# Altium PCB PCBFireflyCaseTest.PcbDoc
Units mil, origin at the board's own origin, x right, y up, seen from the top; angles counter-clockwise.
Board outline 2748 x 1826 mil, 3 copper layers (Top Layer, Mid-Layer 2, Bottom Layer); 119 components, 130 nets, 459 pads, 50 vias.
Unrouted connection lines stored in the file: 286.
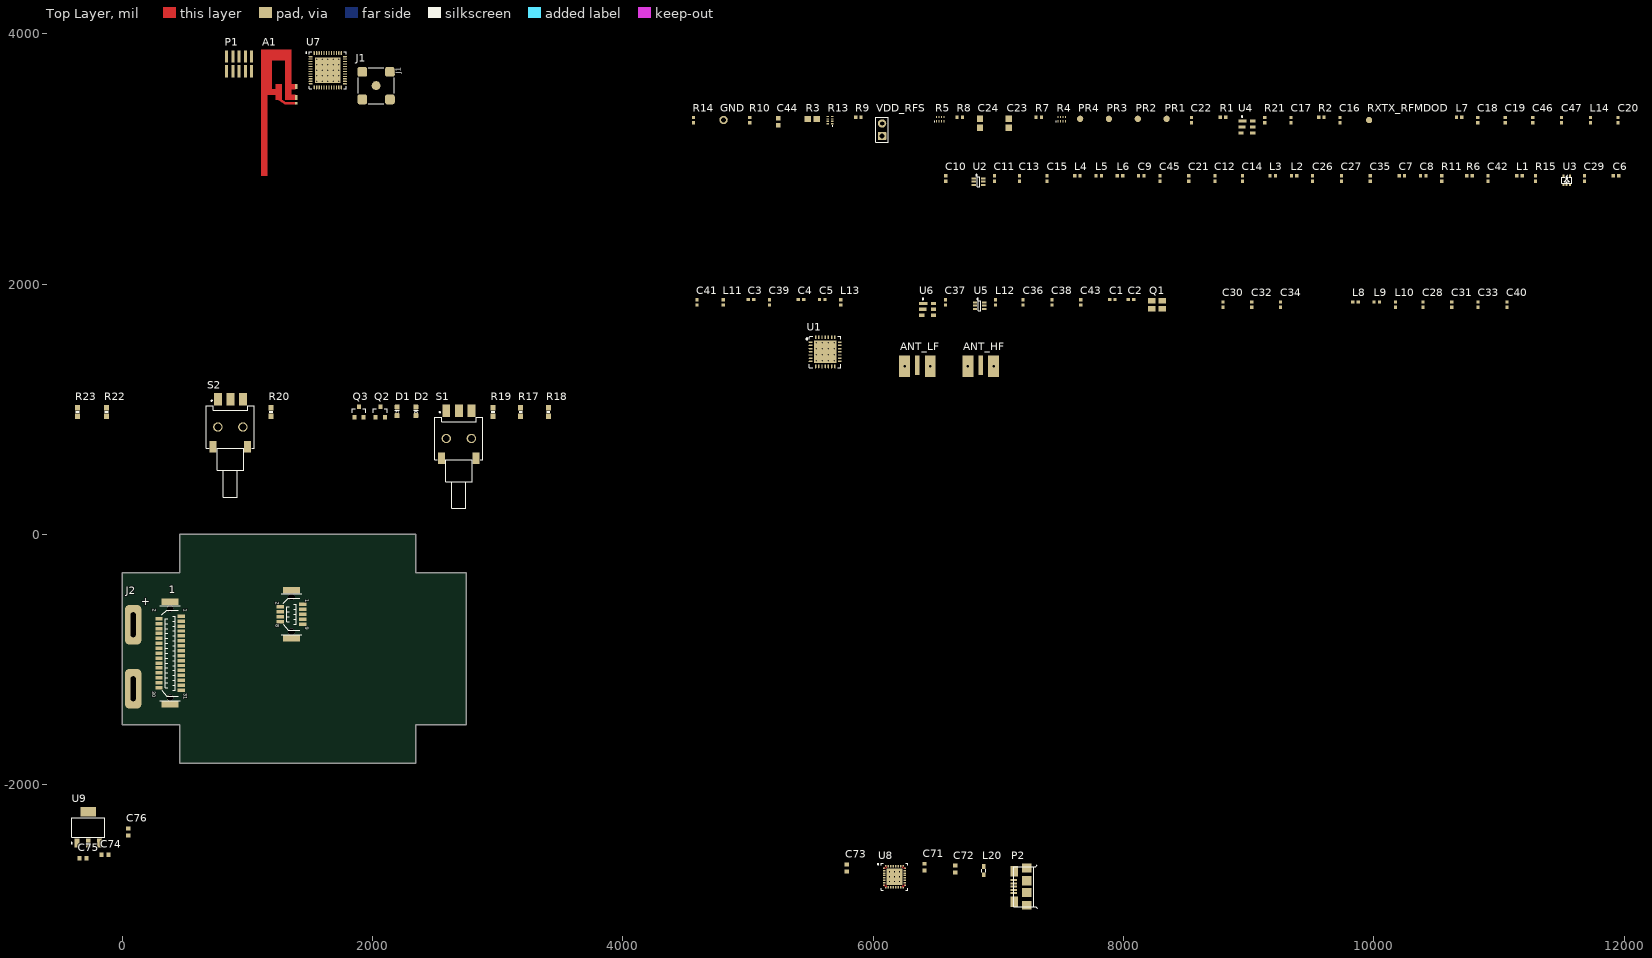
[diagram p0: Top Layer view]
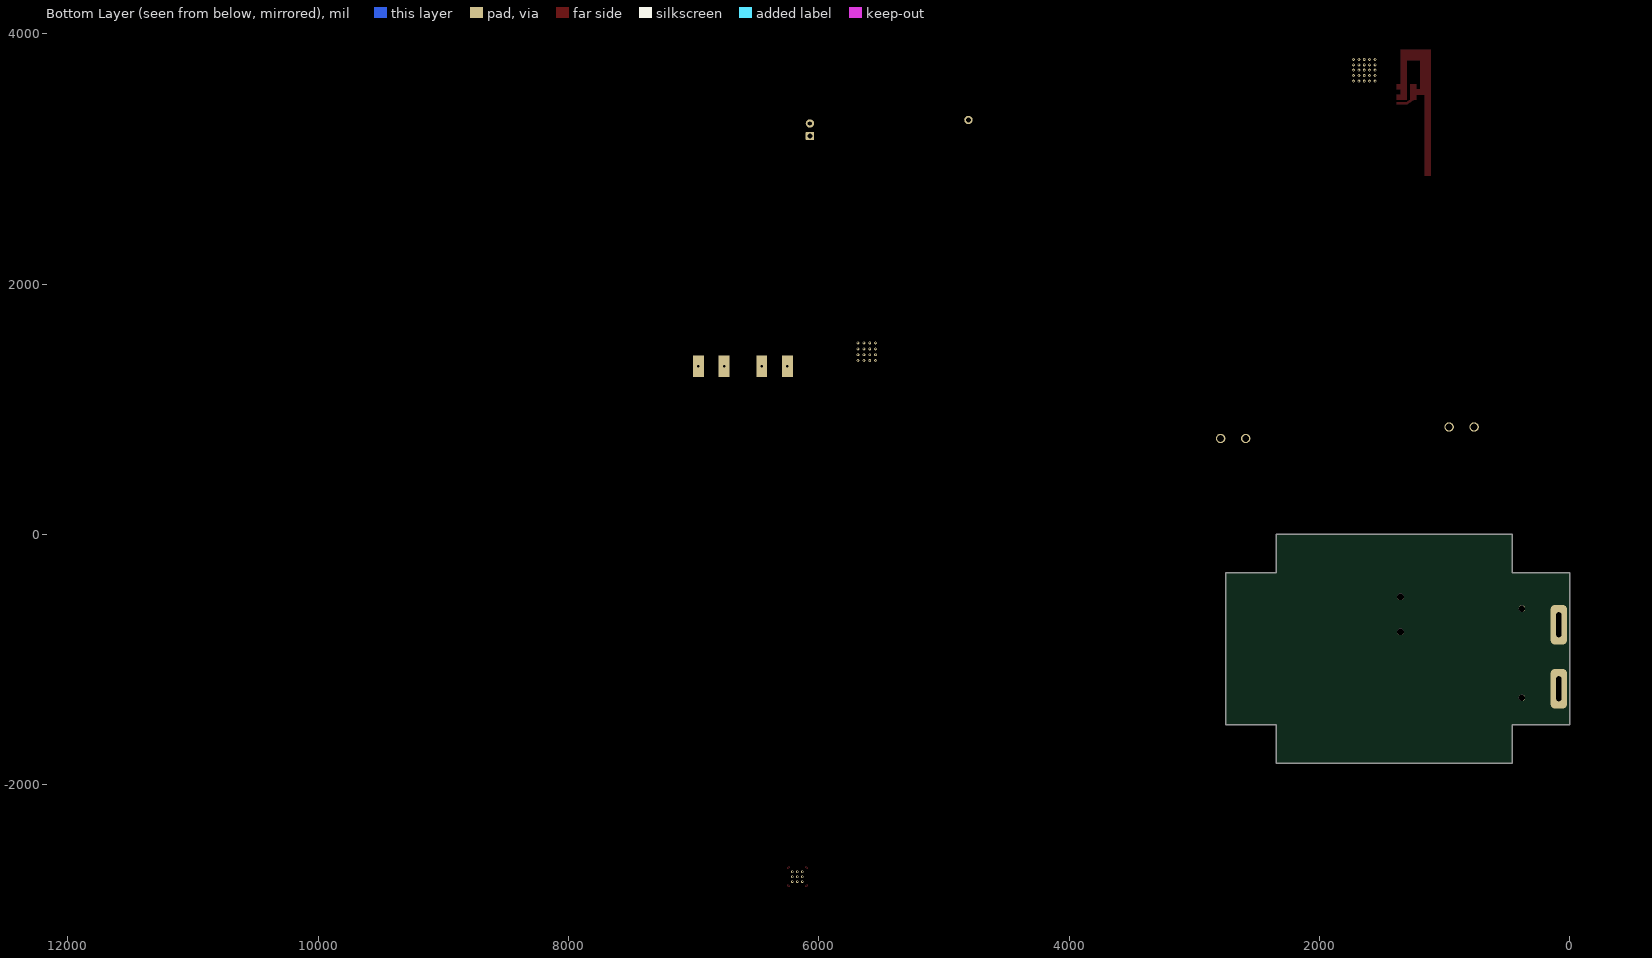
[diagram p1: Bottom Layer view, seen from below]

## Layer stack, top to bottom
Top Solder: solder mask 0.4, Solder Resist, Dk 3.5
Top Layer: signal copper 1.4
Dielectric 1: dielectric 12.6, FR-4, Dk 4.8
Mid-Layer 2: signal copper 1.4
Dielectric2: dielectric 12.6, FR-4, Dk 4.8
Bottom Layer: signal copper 1.4
Bottom Solder: solder mask 0.4, Solder Resist, Dk 3.5

## Board outline
0,-305 462,-305 462,0 2345,0 2345,-305 2748,-305 2748,-1521 2345,-1521 2345,-1826 462,-1826 462,-1521 0,-1521 0,-305

## Design rules (kind name [scope] priority, off if disabled: settings)
Clearance [All] p1: gap=10
PolygonConnect [All] p1: connectstyle=Relief reliefconductorwidth=10 reliefentries=4 polygonreliefangle="90 Angle" airgapwidth=10
RoomDefinition "TI CC 2650 MCU + Radio" [InComponentClass('TI CC 2650 MCU + Radio')] p1: confinementstyle=ConfineIn formatcopy=TRUE lockcomponents=FALSE outline 805.24,2859.24 2247.24,2859.24 2247.24,3977.24 805.24,3977.24
RoomDefinition "Semtech SX1276 Radio" [InComponentClass('Semtech SX1276 Radio')] p2: confinementstyle=ConfineIn formatcopy=TRUE lockcomponents=FALSE outline 4281.86,1258.22 12275,1258.22 12275,3451.65 4281.86,3451.65
RoomDefinition FTDIModule [InComponentClass('FTDIModule')] p3: confinementstyle=ConfineIn formatcopy=TRUE lockcomponents=FALSE outline 5883.1,-3007.39 7320.1,-3007.39 7320.1,-2518.39 5883.1,-2518.39
RoomDefinition Peripherals [InComponentClass('Peripherals')] p4: confinementstyle=ConfineIn formatcopy=TRUE lockcomponents=FALSE outline -882,122.54 3931.87,122.54 3931.87,1651.54 -882,1651.54
RoutingVias [All] p1: holewidth=28 width=50 viastyle="Through Hole" minholewidth=28 minwidth=50 maxholewidth=28 maxwidth=50
SolderMaskExpansion [All] p1: expansion=4
Width [All] p1: maxlimit=10 minlimit=10 preferedwidth=10
30 further rules are at their usual default settings.

## Classes and differential pairs
component class Peripherals: 1 D1 D2 Q2 Q3 R17 R18 R19 R20 R22 R23 S1 S2
component class FTDIModule: C71 C72 C73 L20 P2 U8
component class Main: C74 C75 C76 J2 U9
component class "Semtech SX1276 Radio": ANT_HF ANT_LF C1 C2 C3 C4 C5 C6 C7 C8 C9 C10 C11 C12 C13 C14 C15 C16 C17 C18 C19 C20 C21 C22 C23 C24 C26 C27 C28 C29 C30 C31 C32 C33 C34 C35 C36 C37 C38 C39 C40 C41 C42 C43 C44 C45 C46 C47 GND L1 L2 L3 L4 L5 L6 L7 L8 L9 L10 L11 L12 L13 L14 PR1 PR2 PR3 PR4 Q1 R1 R2 R3 R4 R5 R6 R7 R8 R9 R10 R11 R13 R14 R15 R21 RXTX_RFMDOD U1 U2 U3 U4 U5 U6 VDD_RFS
component class "TI CC 2650 MCU + Radio": A1 C25 C48 C49 C50 C51 C52 C53 C54 C55 C56 C57 C58 C59 C60 C61 C62 C63 C64 C65 C66 C67 C68 C69 C70 FL1 J1 L15 L16 L17 L18 L19 P1 R12 U7 Y1 Y2
net class ADIO[0..7]: ADIO0 ADIO4 ADIO5 ADIO7 ADIO27 ADIO28 ADIO29 ADIO30
net class CBUS[0..4]: CBUS0 CBUS1 CBUS2 CBUS3 CBUS4
net class DIO[0..30]: DIO0 DIO1 DIO2 DIO3 DIO4 DIO5 DIO6 DIO7 DIO8 DIO9 DIO10 DIO11 DIO12 DIO13 DIO14 DIO15 DIO16 DIO17 DIO18 DIO19 DIO20 DIO21 DIO22 DIO23 DIO24 DIO25 DIO26

## Components (designator, comment, footprint, x,y, rotation, side; value= is the part's Value field where it differs from the comment)
1 "Addon Board for Firefly Sensor Nodes    This version is compliant with Firefly Micro powered by Atmel Atmega128RFA1.    Connectors on female gender match those on Firefly Micro Board.    Connectors on male gender mate with Firefly Micro Board. Use these for addons." FIREFLY_MICRO_BOARD 1014,-909 r0 top
A1 "2.4GHz" ANTENNA_DN007AN 1256.24,3368.24 r90 top
ANT_HF "SMA" "SMA END LAUNCH JACK RECEPTACLE SHORT" 6859,1351 r180 top
ANT_LF "SMA" "SMA END LAUNCH JACK RECEPTACLE SHORT" 6353,1351 r180 top
C1 "Cap" rlc_402_smd 7910.65,1875.65 r0 top
C2 "Cap" rlc_402_smd 8059.65,1875.65 r0 top
C3 "Cap" rlc_402_smd 5023.65,1875.65 r0 top
C4 "Cap" rlc_402_smd 5423.65,1875.65 r0 top
C5 "Cap" rlc_402_smd 5593.65,1875.65 r0 top
C6 "Cap" rlc_402_smd 11933,2865.65 r0 top
C7 "Cap" rlc_402_smd 10223,2865.65 r0 top
C8 "Cap" rlc_402_smd 10393,2865.65 r0 top
C9 "Cap" rlc_402_smd 8141,2865.65 r0 top
C10 "Cap" rlc_402_smd 6579,2843.65 r90 top
C11 "Cap" rlc_402_smd 6969,2843.65 r90 top
C12 "Cap" rlc_402_smd 8730,2843.65 r90 top
C13 "Cap" rlc_402_smd 7169,2843.65 r90 top
C14 "Cap" rlc_402_smd 8950,2843.65 r90 top
C15 "Cap" rlc_402_smd 7389,2843.65 r90 top
C16 "Cap" rlc_402_smd 9728,3309.65 r90 top
C17 "Cap" rlc_402_smd 9338,3309.65 r90 top
C18 "Cap" rlc_402_smd 10829,3309.65 r90 top
C19 "Cap" rlc_402_smd 11049,3309.65 r90 top
C20 "Cap" rlc_402_smd 11950,3309.65 r90 top
C21 "Cap" rlc_402_smd 8520,2843.65 r90 top
C22 "Cap" rlc_402_smd 8542,3309.65 r90 top
C23 "Cap" rlc_805_smd 7083,3283.65 r90 top
C24 "Cap" rlc_805_smd 6853,3283.65 r90 top
C26 "Cap" rlc_402_smd 9510,2843.65 r90 top
C27 "Cap" rlc_402_smd 9741,2843.65 r90 top
C28 "Cap" rlc_402_smd 10392,1835.65 r90 top
C29 "Cap" rlc_402_smd 11681,2843.65 r90 top
C30 "Cap" rlc_402_smd 8794,1835.65 r90 top
C31 "Cap" rlc_402_smd 10622,1835.65 r90 top
C32 "Cap" rlc_402_smd 9024,1835.65 r90 top
C33 "Cap" rlc_402_smd 10832,1835.65 r90 top
C34 "Cap" rlc_402_smd 9254,1835.65 r90 top
C35 "Cap" rlc_402_smd 9971,2843.65 r90 top
C36 "Cap" rlc_402_smd 7197.65,1853.65 r90 top
C37 "Cap" rlc_402_smd 6577.65,1853.65 r90 top
C38 "Cap" rlc_402_smd 7427.65,1853.65 r90 top
C39 "Cap" rlc_402_smd 5171.65,1853.65 r90 top
C40 "Cap" rlc_402_smd 11062,1835.65 r90 top
C41 "Cap" rlc_402_smd 4591.65,1853.65 r90 top
C42 "Cap" rlc_402_smd 10911,2843.65 r90 top
C43 "Cap" rlc_402_smd 7658.65,1853.65 r90 top
C44 "Cap Semi" rlc_603_smd 5240,3296.65 r90 top
C45 "Cap" rlc_402_smd 8290,2843.65 r90 top
C46 "Cap" rlc_402_smd 11269,3309.65 r90 top
C47 "Cap" rlc_402_smd 11499,3309.65 r90 top
C71 "Cap 0603" 1608[0603] 6410,-2658 r90 top
C72 "Cap 0603" 1608[0603] 6654.1,-2673.39 r90 top
C73 "Cap 0603" 1608[0603] 5789,-2663 r90 top
C74 "Cap Semi" 1608[0603] -137,-2558 r180 top
C75 "Cap Semi" 1608[0603] -313,-2586 r0 top
C76 "Cap Semi" 1608[0603] 48,-2376 r90 top
D1 "Green" LED-0603 2197,983.54 r0 top
D2 "Red" LED-0603 2347,983.54 r0 top
GND "Test Pin" pin_1mm 4805,3310.65 r90 top
J1 "DNM" HUSTSAN_SMA10V21TGGAN 2029.24,3585.24 r90 top
J2 "Battery Terminal" "Battery Terminal" 89,-977 r0 top
L1 "Inductor" rlc_402_smd 11163,2865.65 r0 top
L2 "Inductor" rlc_402_smd 9362,2865.65 r0 top
L3 "Inductor" rlc_402_smd 9192,2865.65 r0 top
L4 "Inductor" rlc_402_smd 7631,2865.65 r0 top
L5 "Inductor" rlc_402_smd 7801,2865.65 r0 top
L6 "Inductor" rlc_402_smd 7971,2865.65 r0 top
L7 "Inductor" rlc_402_smd 10680,3331.65 r0 top
L8 "Inductor" rlc_402_smd 9853,1857.65 r0 top
L9 "Inductor" rlc_402_smd 10023,1857.65 r0 top
L10 "Inductor" rlc_402_smd 10172,1835.65 r90 top
L11 "Inductor" rlc_402_smd 4801.65,1853.65 r90 top
L12 "Inductor" rlc_402_smd 6977.65,1853.65 r90 top
L13 "Inductor" rlc_402_smd 5741.65,1853.65 r90 top
L14 "Inductor" rlc_402_smd 11730,3309.65 r90 top
L20 "62 Ω" WE-CBA_0603_HC 6884.1,-2685.39 r90 top
P1 "Cortex Debug Header" "Header 1.27mm 2x5 SMD" 935.24,3759.24 r0 top
P2 "USB?" MicroUSB_TypeB 7227.1,-2962.39 r90 top
PR1 "Test Pin" pin_SMD 8344,3319.65 r90 top
PR2 "Test Pin" pin_SMD 8114,3319.65 r90 top
PR3 "Test Pin" pin_SMD 7883,3319.65 r90 top
PR4 "Test Pin" pin_SMD 7653,3319.65 r90 top
Q1 "Xtal" "nd3225da - nd2520da" 8266.65,1834.65 r0 top
Q2 "Common NMOSFET Parts      MFG P/NStore IDProd ID   FDD8780		TRANS-09984	   SI7820DN		TRANS-11055	   FDS6630A		IC-08089	   2N7002PW		TRANS-11151	   FQP30N06L	  COM-10213	TRANS-10060	   BSS123LT1G		TRANS-08345	   BSS138		TRANS-00830	   BS170			   2N7000" SOT23-3 2063,976.54 r0 top
Q3 "Common NMOSFET Parts      MFG P/NStore IDProd ID   FDD8780		TRANS-09984	   SI7820DN		TRANS-11055	   FDS6630A		IC-08089	   2N7002PW		TRANS-11151	   FQP30N06L	  COM-10213	TRANS-10060	   BSS123LT1G		TRANS-08345	   BSS138		TRANS-00830	   BS170			   2N7000" SOT23-3 1893,976.54 r0 top
R1 "Resistor" rlc_402_smd 8794,3331.65 r0 top
R2 "Resistor" rlc_402_smd 9580,3331.65 r0 top
R3 "Resistor" rlc_805_smd 5513,3318.65 r0 top
R4 "EXBN8VxxxJX" EXB28V 7506,3316.65 r0 top
R5 "EXBN8VxxxJX" EXB28V 6536,3316.65 r0 top
R6 "Resistor" rlc_402_smd 10763,2865.65 r0 top
R7 "Resistor" rlc_402_smd 7322,3331.65 r0 top
R8 "Resistor" rlc_402_smd 6692,3331.65 r0 top
R9 "Resistor" rlc_402_smd 5882,3331.65 r0 top
R10 "Resistor" rlc_402_smd 5014,3309.65 r90 top
R11 "Resistor" rlc_402_smd 10541,2843.65 r90 top
R13 "EXBN8VxxxJX" EXB28V 5656,3309.65 r90 top
R14 "Resistor" rlc_402_smd 4564,3309.65 r90 top
R15 "Resistor" rlc_402_smd 11291,2843.65 r90 top
R17 "RES-00818" 0603-RES 3184,977.54 r90 top
R18 "RES-00818" 0603-RES 3405,977.54 r90 top
R19 "RES-00824" 0603-RES 2964,977.54 r90 top
R20 "RES-00824" 0603-RES 1189,977.54 r90 top
R21 "Resistor" rlc_402_smd 9128,3309.65 r90 top
R22 "RES-00824" 0603-RES -124,977.54 r90 top
R23 "RES-00824" 0603-RES -355,977.54 r90 top
RXTX_RFMDOD "Test Pin" pin_SMD 9961,3309.65 r90 top
S1 "" 465031712505 2690,766.54 r0 top
S2 "" 465031712505 865,858.08 r0 top
U1 "SX1276" vqfn28_6x6mm 5616.65,1459 r0 top
U2 "RF Switch" SC70-6 6841,2817.65 r0 top
U3 "NC7SZ04" NC7SZ04_SC70 11514,2791.65 r0 top
U4 "SAW Filter" DCC6C_3.0x3.0mm 8985,3254.65 r0 top
U5 "RF Switch" SC70-6 6849.65,1827.65 r0 top
U6 "SAW Filter" DCC6C_3.0x3.0mm 6434.65,1798.65 r0 top
U7 "CC2650F128RGZT" QFN50P700X700X100_HS-49N 1643.24,3708.24 r0 top
U8 "FT232RQ-Tube" PQFN5X5-32_V 6171,-2734 r0 top
U9 "REG1117-3.3" TI-DCY4_N -270,-2340 r90 top
VDD_RFS "Jumper" bridge_254mm 6071,3182.65 r90 top

## Footprints (in the part's own frame and the unit in brackets; to place one, negate y for a bottom-side part, rotate by r counter-clockwise, add the part's x,y. Pads: shape width x height; smd on the part's side, far side on the other; paste and mask are expansions set on the pad)
0603-RES [mm]
  rect 1.1x1 smd: 1(-0.85,0) 2(0.85,0)
  silkscreen extent -0.19,-0.38 0.19,0.38
1608[0603] [mm] "Chip Capacitor, Body 1.6x0.8mm, IPC High Density"
  rect 0.8x0.9 smd: 1(-0.7,0) 2(0.7,0)
  body extent -0.87,-0.48 0.87,0.48, height 1.3
465031712505 [mm] "9.8x18.5mm left angle type, SMT, diameter of actuator: 2.8mm, SPDT, with bracket design, T/R"
  rect 1.6x2.5 smd: 1(-2.54,5.65) 2(0,5.65) 3(2.54,5.65)
  rect 1.4x2.4 smd: ""(-3.5,-4) ""(3.5,-4)
  round 1.9 hole 1.4: ""(-2.54,0) ""(2.54,0)
  silkscreen extent -4.9,-14.2 4.9,5.47, body extent -4.9,-14.2 4.9,6.4, height 5.84
ANTENNA_DN007AN [mm] "ANTENNA_DN007AN"
  rect 0.46x0.5 smd: 1(1.93,-3.455)
  rect 1x0.5 smd: 2(3.11,-3.455) 3(5.31,-3.455)
  Top Layer region: 12.79,-2.465 12.79,3.705 -12.79,3.705 -12.79,2.495 3.61,2.495 3.61,0.695 2.61,0.695 2.61,0.193 1.7,-1.127 1.7,-3.205 2.16,-3.205 2.16,-1.27 2.681,-0.515 5.81,-0.515 5.81,0.695 4.81,0.695 4.81,1.495 10.61,1.495 10.61,-1.175 2.61,-1.175 2.61,-3.205 3.61,-3.205 3.61,-2.465 4.81,-2.465 4.81,-3.205 5.81,-3.205 5.81,-2.465 12.79,-2.465
"Battery Terminal" [mm] "Battery terminal for the firefly case"
  rrect50% 3.3x8 hole 1 slot 5 at 90 deg: neg(0,-6.5) pos(0,6.5)
bridge_254mm [mm] "Generic Bridge 2.54mm, 2 Leads 0.9mm;"
  rrect20% 1.7x1.7 hole 1 paste+0 mask+0.05: 1(0,0)
  round 1.7 hole 0.9 paste+0 mask+0.05: 2(2.54,0)
  silkscreen extent -1.3,-1.3 3.8,1.3
DCC6C_3.0x3.0mm [mm] "DCC6C footprint, 3.0x3.0mm"
  rrect5% 1.7x0.65 smd mask+0.05: 1(-0.9,1.2)
  rrect5% 1.5x0.65 smd mask+0.05: 2(-1,0)
  rrect5% 1.1x0.65 smd mask+0.05: 3(-1.2,-1.2) 4(1.2,-1.2) 5(1.2,0) 6(1.2,1.2)
  silkscreen extent -1.1,1.95 -0.8,2.25, body extent -1.5,-1.5 1.5,1.5, height 1
EXB28V [mm] "Chip Resistor Array, (0402x4); SM; 8 Leads; Body 2.10 x 1.10 mm (LxW max)"
  rect 0.25x0.5 smd mask+0.05: 1(-0.75,-0.45) 2(-0.25,-0.45) 3(0.25,-0.45) 4(0.75,-0.45) 5(0.75,0.45) 6(0.25,0.45) 7(-0.25,0.45) 8(-0.75,0.45)
  silkscreen extent -1.23,-0.5 -1.13,-0.4
FIREFLY_MICRO_BOARD [mil]
  round 52 hole 52: 1(-630.25,-395.72) 1(-630.25,316.88) 1(339.53,132.16) 1(339.53,411.69)
  rect 59.06x27.56 smd: 1(-541.67,255.86) 2(-718.83,236.17) 3(-541.67,216.49) 4(-718.83,196.8) 5(-541.67,177.12) 6(-718.83,157.43) 7(-541.67,137.75) 8(-718.83,118.06) 9(-541.67,98.38) 10(-718.83,78.69) 11(-541.67,59.01) 12(-718.83,39.32) 13(-541.67,19.64) 14(-718.83,-0.05) 15(-541.67,-19.73) 16(-718.83,-39.42) 17(-541.67,-59.1) 18(-718.83,-78.79) 19(-541.67,-98.47) 20(-718.83,-118.16) 21(-541.67,-137.84) 22(-718.83,-157.53) 23(-541.67,-177.21) 24(-718.83,-196.9) 25(-541.67,-216.58) 26(-718.83,-236.27) 27(-541.67,-255.95) 28(-718.83,-275.64) 29(-541.67,-295.32) 30(-718.83,-315.01) 31(-541.67,-334.69) P1(428.11,350.66) P2(250.94,330.98) P3(428.11,311.29) P4(250.94,291.61) P5(428.11,271.92) P6(250.94,252.24) P7(428.11,232.55) P8(250.94,212.87) P9(428.11,193.18)
  rect 133.86x51.18 smd: M1(339.53,464.83) M2(339.53,79.01) M3(-630.25,-448.87) M4(-630.25,370.03)
  silkscreen extent -713,-419 422,435
"Header 1.27mm 2x5 SMD" [mm] "Header 1.27mm 5x2 SMD"
  rrect10% 0.65x2.5 smd: 1(-2.54,-1.5) 2(-2.54,1.5) 3(-1.27,-1.5) 4(-1.27,1.5) 5(0,-1.5) 6(0,1.5) 7(1.27,-1.5) 8(1.27,1.5) 9(2.54,-1.5) 10(2.54,1.5)
  body extent -3.17,-2.75 3.18,2.75, height 6.4
HUSTSAN_SMA10V21TGGAN [mm] "HUSTSAN_SMA10V21TGGAN"
  round 1.801 smd: 1(0,0)
  rrect48% 2x2 smd: 2(-2.8,-2.8) 3(2.8,-2.8) 4(2.8,2.8) 5(-2.8,2.8)
  silkscreen extent -3.65,-3.65 3.65,3.65
LED-0603 [mm]
  rrect30% 1x1 smd: A(0,-0.877) C(0,0.877)
  silkscreen extent -0.46,-0.14 0.46,0.17
MicroUSB_TypeB [mm]
  rect 0.4x1.35 smd: Pin1(2.5,2.675) Pin2(3.15,2.675) Pin3(3.8,2.675) Pin4(4.45,2.675) Pin5(5.1,2.675)
  rect 1.8x1.9 smd: Shield1(0,0) Shield4(7.6,0)
  rect 1.9x1.9 smd: Shield2(2.6,0) Shield3(5,0)
  rect 2.1x1.6 smd: Shield5(0.7,2.55) Shield6(6.9,2.55)
  silkscreen extent -0.63,-2.16 8.25,2.68
NC7SZ04_SC70 [mm] "NC7SZ04 TinyLogic UHS Inverter SC70 Package"
  rect 0.4x0.5 smd: 1(0,0) 2(0.65,0) 3(1.3,0) 4(1.3,1.9) 5(0,1.9)
  silkscreen extent -0.38,0.38 1.65,2.03
"nd3225da - nd2520da" [mm] "Crystal SMD 3.2x2.5mm compatible with 2.5x2.0mm"
  rect 1.5x1.1 smd mask+0.05: 1(-1.05,-0.8) 2(1.05,-0.8) 3(1.05,0.8) 4(-1.05,0.8)
  body extent -1.6,-1.25 1.6,1.25, height 1
pin_1mm [mm] "Generic Pin 1.1mm; 1 Lead"
  round 1.7 hole 1 paste+0 mask+0.05: 1(0,0)
pin_SMD [mil] "Generic Pin; 1 pin SMD"
  round 50 smd paste-39.37 mask+1.97: 1(0,0)
PQFN5X5-32_V [mm] "QFN, 32-Leads, Body 5x5mm, Pitch 0.5mm, Thermal Pad 3.3x3.3mm, FTDI Recommended"
  rect 0.3x0.3 smd paste-0.15 mask-0.15: 1(-2.2,1.75) 8(-2.2,-1.75) 9(-1.75,-2.2) 16(1.75,-2.2) 17(2.2,-1.75) 24(2.2,1.75) 25(1.75,2.2) 32(-1.75,2.2)
  rect 0.5x0.3 smd paste-0.15 mask+0.06: 2(-2.1,1.25) 3(-2.1,0.75) 4(-2.1,0.25) 5(-2.1,-0.25) 6(-2.1,-0.75) 7(-2.1,-1.25) 18(2.1,-1.25) 19(2.1,-0.75) 20(2.1,-0.25) 21(2.1,0.25) 22(2.1,0.75) 23(2.1,1.25)
  rect 0.3x0.5 smd paste-0.15 mask+0.06: 10(-1.25,-2.1) 11(-0.75,-2.1) 12(-0.25,-2.1) 13(0.25,-2.1) 14(0.75,-2.1) 15(1.25,-2.1) 26(1.25,2.1) 27(0.75,2.1) 28(0.25,2.1) 29(-0.25,2.1) 30(-0.75,2.1) 31(-1.25,2.1)
  rect 3.3x3.3 smd paste-1.65 mask+0.06: 33(0,0)
  Top Layer region: -2.05,-1.6 -1.85,-1.6 -1.85,-1.7 -2.05,-1.9
  Top Layer region: 2.05,-1.6 1.85,-1.6 1.85,-1.7 2.05,-1.9
  Top Layer region: 2.05,1.6 1.85,1.6 1.85,1.7 2.05,1.9
  Top Layer region: -2.05,1.6 -1.85,1.6 -1.85,1.7 -2.05,1.9
  Top Layer region: -1.6,-2.05 -1.6,-1.85 -1.7,-1.85 -1.9,-2.05
  Top Layer region: 1.6,2.05 1.6,1.85 1.7,1.85 1.9,2.05
  Top Layer region: -1.6,2.05 -1.6,1.85 -1.7,1.85 -1.9,2.05
  Top Layer region: 1.6,-1.85 1.6,-2.05 1.9,-2.05 1.7,-1.85
  silkscreen extent -3.47,-2.7 2.7,2.7, body extent -2.55,-2.55 2.55,2.55, height 1
QFN50P700X700X100_HS-49N [mm] "QFN, 48-Leads, Body 7.00x7.00mm, Pitch 0.50mm, Thermal Pad 5.15x5.10mm, IPC Medium Density"
  oval 0.8x0.25 smd: 1(-3.475,2.75) 2(-3.475,2.25) 3(-3.475,1.75) 4(-3.475,1.25) 5(-3.475,0.75) 6(-3.475,0.25) 7(-3.475,-0.25) 8(-3.475,-0.75) 9(-3.475,-1.25) 10(-3.475,-1.75) 11(-3.475,-2.25) 12(-3.475,-2.75) 25(3.475,-2.75) 26(3.475,-2.25) 27(3.475,-1.75) 28(3.475,-1.25) 29(3.475,-0.75) 30(3.475,-0.25) 31(3.475,0.25) 32(3.475,0.75) 33(3.475,1.25) 34(3.475,1.75) 35(3.475,2.25) 36(3.475,2.75)
  oval 0.25x0.8 smd: 13(-2.75,-3.475) 14(-2.25,-3.475) 15(-1.75,-3.475) 16(-1.25,-3.475) 17(-0.75,-3.475) 18(-0.25,-3.475) 19(0.25,-3.475) 20(0.75,-3.475) 21(1.25,-3.475) 22(1.75,-3.475) 23(2.25,-3.475) 24(2.75,-3.475) 37(2.75,3.475) 38(2.25,3.475) 39(1.75,3.475) 40(1.25,3.475) 41(0.75,3.475) 42(0.25,3.475) 43(-0.25,3.475) 44(-0.75,3.475) 45(-1.25,3.475) 46(-1.75,3.475) 47(-2.25,3.475) 48(-2.75,3.475)
  rect 5.15x5.1 smd paste-5.15: 49(0,0)
  silkscreen extent -4.5,-3.73 3.73,3.72, body extent -3.58,-3.58 3.58,3.58, height 1
rlc_402_smd [mm] "Chip SMD component 402; Body 1.0 x 0.5 mm (LxW typ)"
  rect 0.65x0.65 smd mask+0.05: 1(-0.55,0) 2(0.55,0)
rlc_603_smd [mm] "Chip SMD component 603; Body 1.6 x 0.8mm (LxW typ)"
  rect 0.9x0.9 smd paste+0 mask+0.05: 1(-0.75,0) 2(0.75,0)
rlc_805_smd [mm] "Chip SMD component 805; Body 2.0 x 1.25 mm (LxW typ)"
  rect 1.3x1.3 smd mask+0.05: 1(-0.9,0) 2(0.9,0)
SC70-6 [mm] "SC70 6-Leads, Body 2.0x1.25mm, Pitch 0.65mm"
  rect 0.85x0.4 smd mask+0.05: 1(-0.95,0.65) 2(-0.95,0) 3(-0.95,-0.65) 4(0.95,-0.65) 5(0.95,0) 6(0.95,0.65)
  silkscreen extent -0.55,-1 0.25,1.5, body extent -0.63,-1 0.63,1, height 1.45
"SMA END LAUNCH JACK RECEPTACLE SHORT" [mm] "SMA Connector - End Launch Jack Receptacle - Short"
  rrect10% 0.9x4 smd paste+0 mask+0.05: 1(0,0)
  rrect10% 2.2x4.4 hole 0.5 mask+0.05: 2(-2.6,0.2) 2(2.6,0.2)
SOT23-3 [mil]
  rect 31.5x35.43 smd: 1(-37.4,-39.37) 2(37.4,-39.37) 3(0,43.31)
  silkscreen extent -55,-4 55,28
TI-DCY4_N [mm] "SOT223, 4-Leads, Body 6.5x3.5mm, Pitch 2.3mm, IPC Medium Density"
  rect 1.85x1 smd: 1(-3.175,2.3) 2(-3.175,0) 3(-3.175,-2.3)
  rect 1.85x3.2 smd: 4(3.175,0)
  silkscreen extent -3.3,-3.35 1.95,3.47, body extent -1.85,-3.35 1.85,3.35, height 1.8
vqfn28_6x6mm [mm] "28 Leads, Body 6.0x6.0mm, Pitch 0.65mm, VQFN28"
  oval 0.8x0.3 smd mask+0.05: 1(-2.95,1.95) 2(-2.95,1.3) 3(-2.95,0.65) 4(-2.95,0) 5(-2.95,-0.65) 6(-2.95,-1.3) 7(-2.95,-1.95) 15(2.95,-1.95) 16(2.95,-1.3) 17(2.95,-0.65) 18(2.95,0) 19(2.95,0.65) 20(2.95,1.3) 21(2.95,1.95)
  oval 0.3x0.8 smd mask+0.05: 8(-1.95,-2.95) 9(-1.3,-2.95) 10(-0.65,-2.95) 11(0,-2.95) 12(0.65,-2.95) 13(1.3,-2.95) 14(1.95,-2.95) 22(1.95,2.95) 23(1.3,2.95) 24(0.65,2.95) 25(0,2.95) 26(-0.65,2.95) 27(-1.3,2.95) 28(-1.95,2.95)
  rrect5% 4.6x4.6 smd paste-3.3 mask+0.05: 29(0,0)
  Mechanical 15 keep-out lines w0.1: -3.5,-3.5 3.5,-3.5 3.5,3.5 -3.5,3.5 -3.5,-3.5
  silkscreen extent -3.9,-3.2 3.2,3.2, body extent -3,-3 3,3, height 1
WE-CBA_0603_HC [mm] "High Current type"
  rect 0.95x0.7 smd: 1(-0.825,0) 2(0.825,0)
  silkscreen extent -0.29,-0.4 0.29,0.4, body extent -0.8,-0.4 0.8,0.4, height 0.81

## Part data
1: library part FIREFLY_MICRO_BOARD
A1: library part ANTENNA_DN007
ANT_HF ANT_LF: "SMA Straight Connector"
C1 C2 C3 C4 C5 C6 C7 C8 C9 C10 C11 C12 C13 C14 C15 C16 C17 C18 C19 C20 C21 C22 C23 C24 C26 C27 C28 C29 C30 C31 C32 C33 C34 C35 C36 C37 C38 C39 C40 C41 C42 C43 C45 C46 C47: "Capacitor SMD"
C44 C74 C75 C76: "Capacitor (Semiconductor SIM Model)"
C71 C72 C73: library part "Cap Semi", "Capacitor (Semiconductor SIM Model)"
D1: library part LED-GREEN0603
D2: library part LED-RED0603
GND PR1 PR2 PR3 PR4 RXTX_RFMDOD: library part test_pin
J1: library part CONN_COAX_1+4
L1 L2 L3 L4 L5 L6 L7 L8 L9 L10 L11 L12 L13 L14: "Inductor SMD"
L20: library part "WE-CBA 0603,  782633620", "WE-CBA SMD EMI Suppression Ferrite Bead, Impedance = 62 O, High Current"
P1: library part "Header 5X2", "Header, 5-Pin, Dual row, Right Angle"
P2: library part "MicroUSB TypeB", "Micro USB Type B Port"
Q1: library part "Xtal GND", "Crystal with GND pins"
Q2 Q3: library part MOSFET-NCHANNELBSS138
R1 R2 R3 R6 R7 R8 R9 R10 R11 R14 R15 R21: "Resistor SMD - IEC symbol version"
R4 R5 R13: "Mini-Flat Package, Isolated Resistor Network, 0.031 W/resistor"
R17 R18: library part 330OHM1/10W1%(0603)
R19 R20 R22 R23: library part 10KOHM-1/10W-1%(0603)0603
S1 S2: library part "WS-PBSU, 465031712505", "WS-PBSU 9.8 x 18.5 mm SMD side push"
U1: "SX1276 - Low Power Integrated UHF Transceiver with loRa Modem"
U2 U5: library part "PE4259 RF Switch", "PE4259 Peregrine RF Switch"
U3: "NC7SZ04 TinyLogic UHS Inverter SC70 Package"
U4 U6: "SAW Filter - Bandpass - TEMEX type"
U8: "USB UART Asynchronous Serial Data Transfer Chip, 32-pin QFN, Tube"
U9: "Single Output LDO, 800 mA, Fixed 3.3 V Output, 3.8 to 15 V Input, with Internal Current Limiting, 4-pin SOT-223 (DCY), -40 to 125 degC, Green (RoHS & no Sb/Br)"
VDD_RFS: "Jumper Wire"

## Via types
v1: diameter 23.62, hole 11.81, Top Layer to Bottom Layer, 25 vias
v2: diameter 23.62, hole 11.81, Top Layer to Bottom Layer, tented top, 16 vias
v3: diameter 19.68, hole 7.87, Top Layer to Bottom Layer, tented top, 9 vias

## Nets (pads, with @x,y where several pads share a name; then routed paths per layer and width w, separated by ;. In a path a pad name is that pad's centre, name@x,y a point inside that pad or via, vN(x,y) a via of type N, cw(c..) or ccw(c..) an arc to the next point about the centre after c; other vN are vias at no path point)
ADIO0: 1.23
ADIO4: 1.27
ADIO5: 1.28
ADIO7: 1.22
ADIO27: 1.24 U7.40
ADIO28: 1.25 U7.41
ADIO29: 1.26 U7.42
ADIO30: 1.29 U7.43
CBUS0: U8.22
CBUS1: U8.21
CBUS2: U8.10
CBUS3: U8.11
CBUS4: U8.9
CTRL2: C42.1 R11.1 U3.4 U5.4
DCDC_SW: U7.33
DIO0: R20.2 S2.2 U7.5
DIO0_SX: R4.4 U1.8
DIO1: R4.5 U7.6
DIO1_SX: R4.3 U1.9
DIO2: U7.7 U8.30
DIO2_SX: R4.2 U1.10
DIO3: U7.8 U8.2
DIO3_SX: R4.1 U1.11
DIO4: R4.6 U7.9
DIO4_SX: R5.4 U1.12
DIO5: 1.4 U7.10
DIO5_SX: R5.3 U1.13
DIO6: 1.6 R22.1 U7.11
DIO7: 1.7 R23.1 U7.12
DIO8: 1.12 PR4.1 R13.5 U7.14
DIO9: 1.13 PR3.1 R13.6 U7.15
DIO10: 1.11 PR1.1 R5.7 U7.16
DIO11: PR2.1 R13.7 U7.17
DIO12: R14.2 U7.18
DIO13: Q2.1 U7.19
DIO14: Q3.1 U7.20
DIO15: R2.2 R7.2 R8.1 U7.21
DIO16: 1.17 U7.26
DIO17: 1.10 U7.27
DIO18: R9.2 R10.1 R11.2 R15.2 R21.2 U7.28
DIO19: R4.7 U7.29
DIO20: R4.8 U7.30
DIO21: R5.5 U7.31
DIO22: R5.6 U7.32
DIO23: 1.9 U7.36
DIO24: 1.8 U7.37
DIO25: 1.16 U7.38
DIO26: 1.21 U7.39
FTDI_3V3: C73.2 U8.16
FTDI_CTS: U8.8
FTDI_DTR: C76.2 U8.31
FTDI_RTS: U8.32
FTDI_VIO: 1.1 1.2 1.30 1.P1 C6.1 C75.2 J2.pos P1.1 R7.1 R9.1 R17.1 R18.1 R19.2 R22.2 R23.2 S2.1 U3.5 U8.1 U9.2 U9.4
GND: 1.31 1.P8 A1.2 A1.3 ANT_HF.2 ANT_LF.2 C1.1 C2.1 C3.1 C4.1 C5.1 C6.2 C7.1 C8.1 C10.1 C11.1 C13.1 C15.1 C16.1 C17.1 C21.1 C22.2 C23.1 C24.1 C26.1 C27.1 C29.1 C30.1 C32.1 C34.1 C35.1 C37.1 C40.1 C41.1 C42.2 C43.1 C44.1 C45.1 C46.1 C47.1 C71.1 C72.1 C73.1 C74.1 C75.1 GND.1 J1.2 J1.3 J1.4 J1.5 J2.neg L13.1 P1.3 P1.5 P1.9 P2.Pin5 Q1.2 Q1.4 Q2.2 Q3.2 R8.2 R10.2 R20.1 S1.1 U1.15 U1.23 U1.26 U1.29 U2.2 U3.3 U4.1 U4.3 U4.4 U4.6 U5.2 U6.1 U6.3 U6.4 U6.6 U7.49 U8.4 U8.17 U8.20 U8.24 U8.26 U8.33 U9.1
  other v1: 1556.62,3621.62 1599.93,3621.62 1643.24,3621.62 1686.54,3621.62 1729.85,3621.62 1556.62,3664.93 1599.93,3664.93 1643.24,3664.93 1686.54,3664.93 1729.85,3664.93 1556.62,3708.24 1599.93,3708.24 1643.24,3708.24 1686.54,3708.24 1729.85,3708.24 1556.62,3751.54 1599.93,3751.54 1643.24,3751.54 1686.54,3751.54 1729.85,3751.54 1556.62,3794.85 1599.93,3794.85 1643.24,3794.85 1686.54,3794.85 1729.85,3794.85
  other v2: 5545.79,1388.13 5593.03,1388.13 5640.28,1388.13 5687.52,1388.13 5545.79,1435.38 5593.03,1435.38 5640.28,1435.38 5687.52,1435.38 5545.79,1482.62 5593.03,1482.62 5640.28,1482.62 5687.52,1482.62 5545.79,1529.87 5593.03,1529.87 5640.28,1529.87 5687.52,1529.87
  other v3: 6131.63,-2773.37 6171,-2773.37 6210.37,-2773.37 6131.63,-2734 6171,-2734 6210.37,-2734 6131.63,-2694.63 6171,-2694.63 6210.37,-2694.63
JTAG_TCK: P1.4 U7.25
JTAG_TMS: P1.2 U7.24
MCU_NRESET: 1.3 C76.1 P1.10 R19.1 S1.2 U7.35
MCU_TX0: 1.18 1.19
MISO_SX: R13.4 U1.17
MOSI_SX: R13.3 U1.18
NetA1_1: A1.1
NetANT_HF_1: ANT_HF.1 C47.2 L14.2
NetANT_LF_1: ANT_LF.1 C41.2 L11.2
NetC1_2: C1.2 Q1.1 U1.6
NetC2_2: C2.2 Q1.3 U1.5
NetC4_2: C4.2 U1.2
NetC5_2: C5.2 U1.4
NetC7_2: C7.2 C8.2 C35.2 L1.1 L2.2 U1.25
NetC9_1: C9.1 L4.1
NetC9_2: C9.2 C10.2 L2.1 L3.1
NetC11_2: C11.2 C12.2 L4.2 L5.1
NetC12_1: C12.1 C13.2 C14.2 L5.2 L6.1
NetC14_1: C14.1 C15.2 L6.2 U2.1
NetC16_2: C16.2 L7.1 U1.21
NetC17_2: C17.2 C18.2 L7.2
NetC18_1: C18.1 U4.5
NetC19_1: C19.1 U2.3
NetC19_2: C19.2 U4.2
NetC20_1: C20.1 C46.2 L14.1
NetC20_2: C20.2 U2.5
NetC28_1: C28.1 L8.1
NetC28_2: C28.2 C29.2 L1.2 U1.28
NetC30_2: C30.2 C31.2 L8.2 L9.1
NetC31_1: C31.1 C32.2 C33.2 L9.2 L10.1
NetC33_1: C33.1 C34.2 L10.2 U5.3
NetC36_1: C36.1 U6.5
NetC36_2: C36.2 C37.2 L12.2
NetC38_1: C38.1 U5.1
NetC38_2: C38.2 U6.2
NetC39_1: C39.1 C40.2 L11.1
NetC39_2: C39.2 U5.5
NetC57_2: 
NetC59_1: 
NetC59_2: U7.1
NetC60_1: J1.1
NetC60_2: 
NetC61_1: 
NetC63_2: 
NetC65_2: U7.2
NetC66_2: U7.3
NetC67_2: U7.4
NetC68_2: U7.23
NetC69_2: U7.47
NetC70_2: U7.46
NetC71_2: C71.2 L20.1 P2.Pin1
NetD1_A: D1.A R17.2
NetD1_C: D1.C Q2.3
NetD2_A: D2.A R18.2
NetD2_C: D2.C Q3.3
NetL3_2: L3.2 U1.27
NetL12_1: L12.1 L13.2 U1.1
NetR6_2: R6.2 R15.1 U3.2
NRESET_SX: R14.1 U1.7
NSS_SX: R13.2 U1.19
PB4: 1.14
PB5: 1.15
PE2: 1.20
PG1: 1.5
RXTX_LINK: C22.1 R1.2 R2.1 R6.1 U2.4
RXTX_RF: R13.8
RXTX_RF_SX: R1.1 R13.1 R21.1 RXTX_RFMDOD.1 U1.20
SCK_SX: R5.2 U1.16
USB_5V: C72.2 C74.2 L20.2 U8.19 U9.3
USB_DM: P2.Pin2 U8.15
USB_DP: P2.Pin3 U8.14
VDD_ANA: C24.2 C43.2 C45.2 U2.6 U5.6
VDD_RF: C23.2 R3.2 VDD_RFS.1
VDD_RFS: C3.2 C21.2 C26.2 C27.2 C44.2 R3.1 U1.3 U1.14 U1.24 VDD_RFS.2
VDDR: U7.45 U7.48
VDDS: U7.13 U7.22 U7.34 U7.44
pads on no net: 1.M1 1.M2 1.M3 1.M4 1.P2 1.P3 1.P4 1.P5 1.P6 1.P7 1.P9 P1.6 P1.7 P1.8 P2.Pin4 P2.Shield1 P2.Shield2 P2.Shield3 P2.Shield4 P2.Shield5 P2.Shield6 R5.1 R5.8 S1. S1.3 S2. S2.3 U1.22 U3.1 U8.3 U8.5 U8.6 U8.7 U8.12 U8.13 U8.18 U8.23 U8.25 U8.27 U8.28 U8.29

## Text inside footprints (layer, text, board x,y; h text height)
1: Top Overlay "9" at 1451.95,-735.5 h49.6 r270; Top Overlay "8" at 1215.73,-715.82 h49.6 r270; Top Overlay "2" at 1215.73,-538.65 h49.6 r270; Top Overlay "31" at 482.17,-1267.32 h49.6 r270; Top Overlay "30" at 230.2,-1251.57 h49.6 r270; Top Overlay "2" at 234.14,-594.09 h49.6 r270
A1: Mechanical 11 "1" at 1392.26,3441.07 h7.87 r90; Mechanical 11 "3" at 1392.26,3574.14 h7.87 r90; Mechanical 11 "2" at 1392.26,3487.53 h7.87 r90; Mechanical 17 "MICHAL BLACHUCKI" at 1332.93,3025.13 h7.87 r90; Mechanical 18 "ROBERT MITAL" at 1317.18,3025.13 h7.87 r90; Mechanical 19 "2011-09-19" at 1346.71,3025.13 h7.87 r90
J1: Mechanical 11 "1" at 2029.24,3582.09 h7.87 r90; Mechanical 11 "2" at 2139.47,3471.85 h7.87 r90; Mechanical 11 "3" at 2139.47,3692.32 h7.87 r90; Mechanical 11 "5" at 1919,3471.85 h7.87 r90; Mechanical 11 "4" at 1919,3692.32 h7.87 r90; Mechanical 17 "MICHAL BLACHUCKI" at 2034.98,3560.24 h7.87 r90; Mechanical 18 "ROBERT MITAL" at 2019.24,3560.24 h7.87 r90; Mechanical 19 "2011-07-18" at 2048.76,3560.24 h7.87 r90; Mechanical 16 "COPYRIGHTS 2011 @ DYNAMIC PRECISION" at 1865.85,3467.13 h7.87 r90
J2: Top Overlay "+" at 154,-567 h60